# EAGLE board Quad-remote (EAGLE 6.5.0)
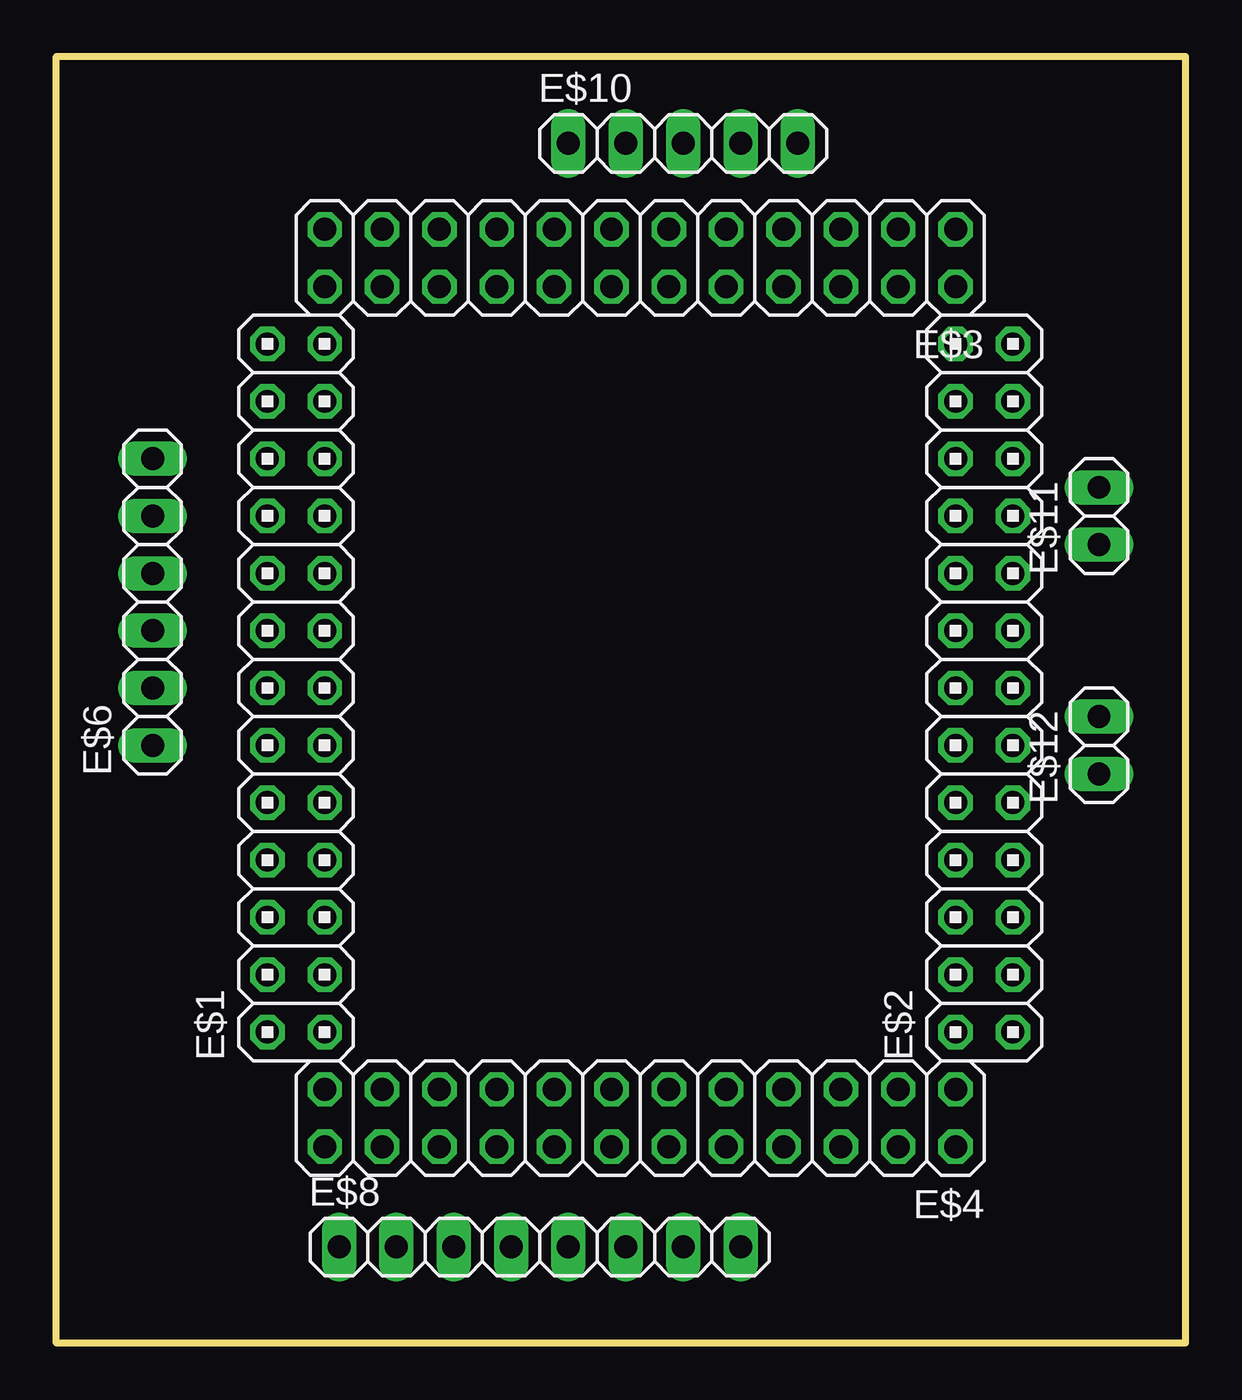
[diagram p0: board, top side]
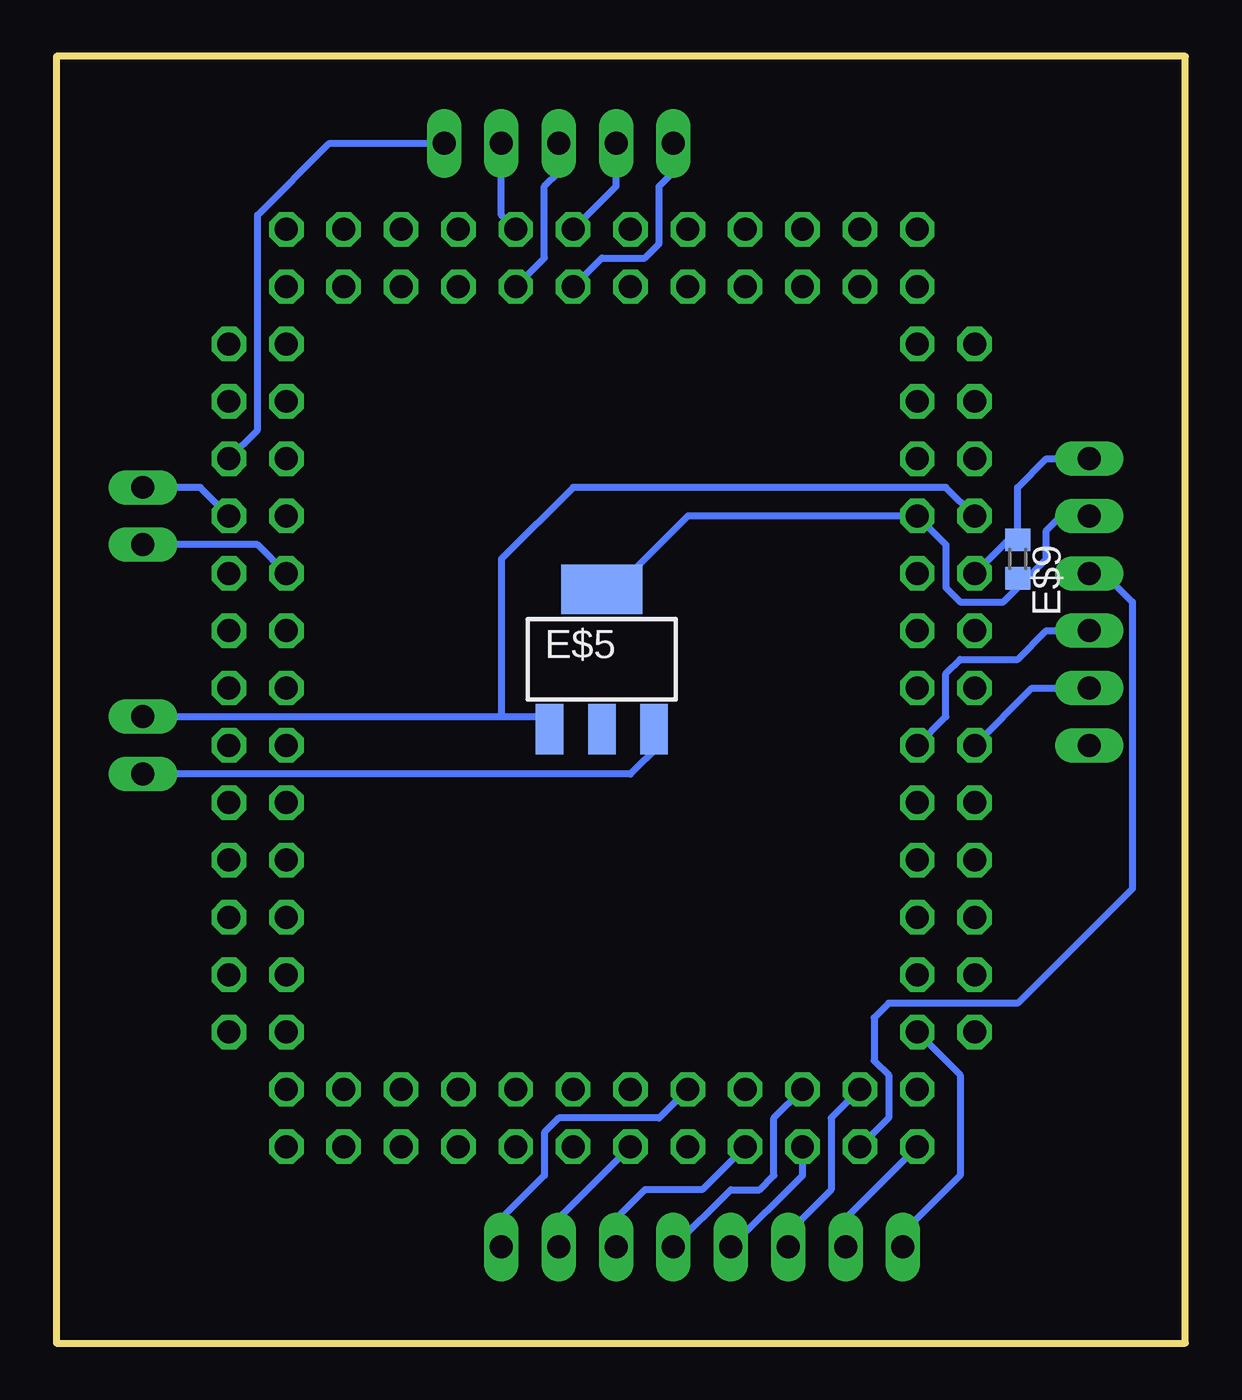
[diagram p1: board, bottom side, seen from below]

Size 50 x 57 mm. Coordinates in mm from the lower left corner, seen from the top.
Outline: 0,57 50,57 50,0 0,0 0,57
Copper layers (1*16): Top 0.035mm / dielectric 1.5mm / Bottom 0.035mm
Design rules "default": minimum track width 10mil, minimum drill 24mil, track to track 8mil, track to pad 8mil, pad to pad 8mil, via to via 8mil, smd to smd 8mil, copper to edge 40mil, drill to drill 8mil, minimum pad ring 10mil, minimum via ring 8mil, stop-mask expansion 4mil, vias tented up to drill 0mil, thermal gap 10mil

## Footprints (pad centres in the part's own frame; a part is rotated, then mirrored left to right if it is on the bottom)
2X13 = drill 1.016 octagon: 1 -15.24,-1.27; 2 -15.24,1.27; 3 -12.7,-1.27; 4 -12.7,1.27; 5 -10.16,-1.27; 6 -10.16,1.27; 7 -7.62,-1.27; 8 -7.62,1.27; 9 -5.08,-1.27; 10 -5.08,1.27; 11 -2.54,-1.27; 12 -2.54,1.27; 13 0,-1.27; 14 0,1.27; 15 2.54,-1.27; 16 2.54,1.27; 17 5.08,-1.27; 18 5.08,1.27; 19 7.62,-1.27; 20 7.62,1.27; 21 10.16,-1.27; 22 10.16,1.27; 23 12.7,-1.27; 24 12.7,1.27; 25 15.24,-1.27; 26 15.24,1.27
2X12 = drill 1.016 octagon: 1 -13.97,-1.27; 2 -13.97,1.27; 3 -11.43,-1.27; 4 -11.43,1.27; 5 -8.89,-1.27; 6 -8.89,1.27; 7 -6.35,-1.27; 8 -6.35,1.27; 9 -3.81,-1.27; 10 -3.81,1.27; 11 -1.27,-1.27; 12 -1.27,1.27; 13 1.27,-1.27; 14 1.27,1.27; 15 3.81,-1.27; 16 3.81,1.27; 17 6.35,-1.27; 18 6.35,1.27; 19 8.89,-1.27; 20 8.89,1.27; 21 11.43,-1.27; 22 11.43,1.27; 23 13.97,-1.27; 24 13.97,1.27
SOT223 = smd 1.219 x 2.235: 1 -2.311,-3.099; 2 0,-3.099; 3 2.311,-3.099 | smd 3.6 x 2.2: 4 0,3.099
1X06 = drill 1.016 long: 1 -6.35,0; 2 -3.81,0; 3 -1.27,0; 4 1.27,0; 5 3.81,0; 6 6.35,0
1X08 = drill 1.016 long: 1 -8.89,0; 2 -6.35,0; 3 -3.81,0; 4 -1.27,0; 5 1.27,0; 6 3.81,0; 7 6.35,0; 8 8.89,0
R0603 = smd 1 x 1.1: 1 -0.85,0; 2 0.85,0
1X05 = drill 1.016 long: 1 -5.08,0; 2 -2.54,0; 3 0,0; 4 2.54,0; 5 5.08,0
1X02 = drill 1.016 long: 1 -1.27,0; 2 1.27,0

## Placement (x,y rotation side)
E$1  [2X13]  10.61,29.02 90 top
E$2  [2X13]  41.09,29.02 90 top
E$3  [2X12]  25.85,48.07 180 top
E$4  [2X12]  25.85,9.97 180 top
E$5  [SOT223]  25.85,30.29 0 bottom
E$6  [1X06]  4.26,32.83 90 top
E$8  [1X08]  21.41,4.25 0 top
E$9  [R0603]  7.43,34.73 270 bottom
E$10  [1X05]  27.75,53.15 0 top
E$11  [1X02]  46.17,36.64 90 top
E$12  [1X02]  46.17,26.48 90 top

## Library data of the parts
E$1-E$4 E$6 E$8 E$10-E$12 = pinhead
E$5 E$9 = smd-ipc

## Nets
S$20: E$1.20 E$12.2
S$21: E$1.19 E$6.5
S$22: E$1.18 E$6.6
S$23: E$1.12 E$6.2
S$24: E$1.11 E$6.3
S$25: E$1.1 E$8.1
S$26: E$4.24 E$8.2
S$27: E$4.21 E$8.3
S$28: E$4.19 E$8.5
S$29: E$4.20 E$8.4
S$30: E$4.18 E$8.6
S$31: E$4.14 E$8.7
S$32: E$4.15 E$8.8
S$34: E$2.21 E$10.5
S$36: E$3.9 E$10.4
S$37: E$3.10 E$10.3
S$38: E$3.11 E$10.2
S$39: E$3.12 E$10.1
S$40: E$2.19
S$41: E$2.18 E$11.1
S$43: E$4.22 E$6.4

## Tracks (layer width: path | path; a pad name or v marks a point on that pad's centre or on a via)
S$20
  Bottom 0.305: E$1.20 10.61,37.91 27.12,37.91 30.3,34.73 30.3,27.75 | E$12.2 30.3,27.75 | 30.3,27.75 28.39,27.75
S$21
  Bottom 0.305: 25.21,33.47 22.04,36.64 E$1.19 10.61,35.37 10.61,33.47 9.97,32.83 8.07,32.83 6.17,34.73 6.17,36.01 5.53,36.64 E$6.5
S$22
  Bottom 0.305: E$1.18 7.43,36.01 7.43,37.91 6.17,39.18 E$6.6
S$23
  Bottom 0.305: E$1.12 6.8,29.02 E$6.2
S$24
  Bottom 0.305: E$1.11 10.61,27.75 10.61,29.66 9.97,30.29 7.43,30.29 6.17,31.56 E$6.3
S$25
  Bottom 0.305: E$1.1 9.97,11.88 9.97,7.43 12.52,4.89 E$8.1
S$26
  Bottom 0.305: E$4.24 15.05,5.53 E$8.2
S$27
  Bottom 0.305: E$4.21 15.69,9.97 15.69,6.79 17.59,4.89 E$8.3
S$28
  Bottom 0.305: E$8.5 20.14,6.79 18.86,6.79 18.23,7.43 18.23,9.97 E$4.19
S$29
  Bottom 0.305: E$8.4 16.96,7.43 E$4.20
S$30
  Bottom 0.305: E$4.18 21.41,6.79 23.95,6.79 25.21,5.53 E$8.6
S$31
  Bottom 0.305: E$4.14 27.75,5.53 E$8.7
S$32
  Bottom 0.305: E$4.15 23.31,9.97 27.75,9.97 28.39,9.34 28.39,7.43 30.3,5.53 E$8.8
S$34
  Bottom 0.305: E$2.21 41.09,40.45 41.09,49.98 37.91,53.15 E$10.5
S$36
  Bottom 0.305: E$3.9 30.3,49.98 E$10.4
S$37
  Bottom 0.305: E$3.10 28.39,48.07 28.39,51.24 27.75,51.88 E$10.3
S$38
  Bottom 0.305: E$3.11 25.21,51.24 E$10.2
S$39
  Bottom 0.305: E$3.12 25.85,48.07 23.95,48.07 23.31,48.7 23.31,51.24 22.68,51.88 E$10.1
S$40
  Bottom 0.305: E$2.19 43.63,37.91 46.17,37.91
S$41
  Bottom 0.305: E$2.18 41.09,35.37 E$11.1
S$42
  Bottom 0.305: 23.31,26.48 24.58,25.21 46.17,25.21
S$43
  Bottom 0.305: E$6.4 3.62,34.1 2.35,32.83 2.35,20.13 7.43,15.05 13.15,15.05 13.79,14.41 13.79,12.51 13.15,11.88 13.15,9.97 E$4.22

## Text on the board
tNames: Up | Down | Left | Right | Gnd | +5 | Signal